# Altium PCB 剥皮器20200614.PCBDOC (part 2 of 2)
Units mm, origin at the board's own origin, x right, y up, seen from the top; angles counter-clockwise.
Board outline 94.23 x 92 mm, 4 copper layers (Top Layer, MidLayer1, MidLayer2, Bottom Layer); 71 components, 81 nets, 348 pads, 574 vias.
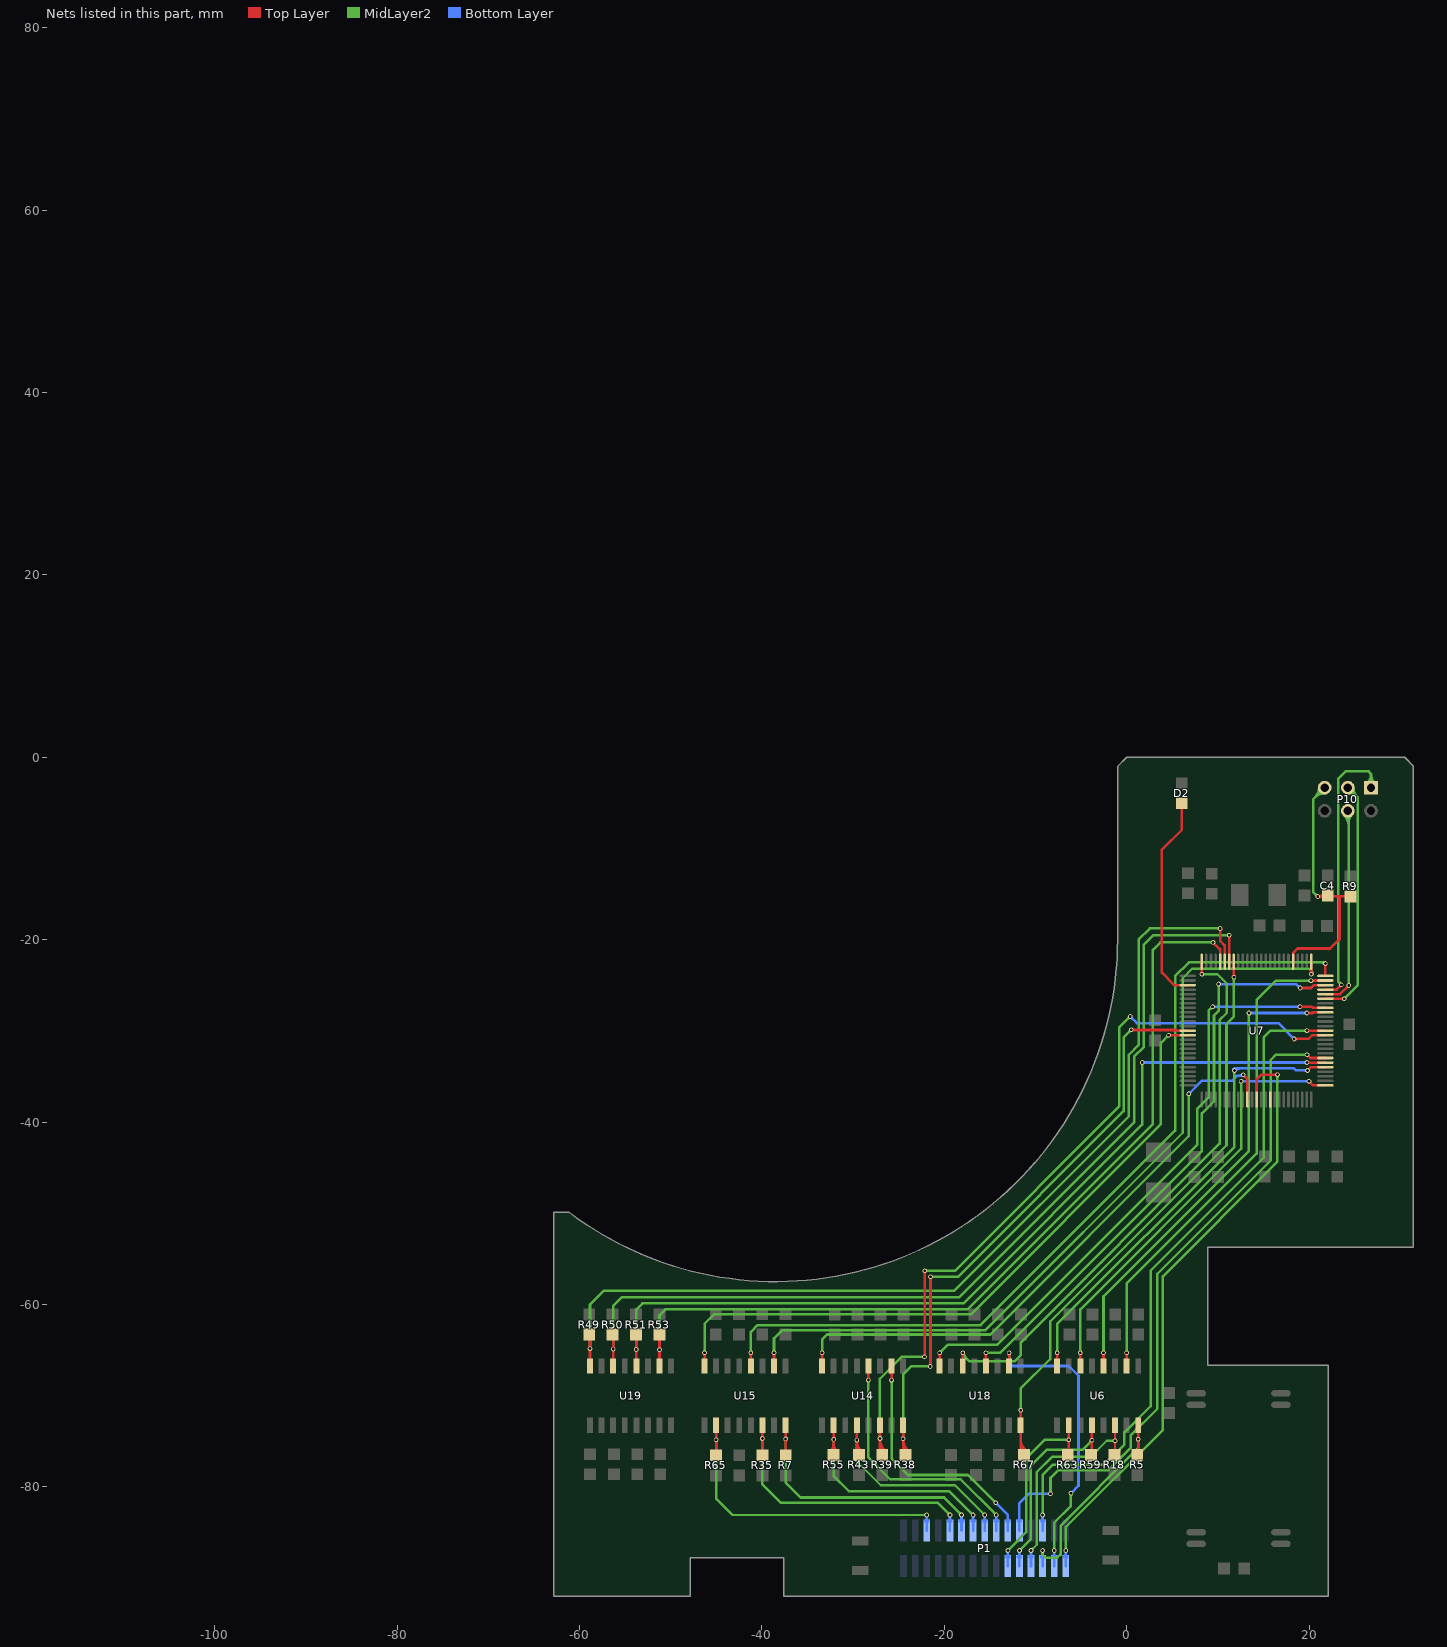
[diagram p4: the nets of this part, all layers, seen from the top]

## Via types
v1: diameter 0.508, hole 0.305, Top Layer to Bottom Layer, tented both sides, 552 vias
v2: diameter 0.762, hole 0.508, Top Layer to Bottom Layer, tented both sides, 22 vias

## Nets (pads, with @x,y where several pads share a name; then routed paths per layer and width w, separated by ;. In a path a pad name is that pad's centre, name@x,y a point inside that pad or via, vN(x,y) a via of type N, cw(c..) or ccw(c..) an arc to the next point about the centre after c; other vN are vias at no path point) (continued)
PA6_A: P1.16 R43.2 U14.12 | length 30.6
  Top Layer w0.254: R43.2@-29.735,-76.131 ccw(c-30.071,-75.795) -29.596,-75.795 ; U14.12@-29.736,-73.894 cw(c-30.074,-74.232) -29.596,-74.232 cw(c-29.118,-74.232) U14.12@-29.456,-73.894 ; v1@-29.686,-74.969 cw(c-29.903,-75.186) -29.596,-75.186 cw(c-29.29,-75.186) v1@-29.506,-74.969 ; v1@-29.686,-74.789 ccw(c-29.903,-74.573) -29.596,-74.573 ccw(c-29.29,-74.573) v1@-29.506,-74.789 ; -29.596,-75.428 ccw(c-28.458,-75.428) R43.2@-29.195,-76.296 ; U14.12@-29.596,-73.254 v1(-29.596,-74.879) ; R43.2@-29.367,-76.499 -29.596,-76.27 v1(-29.596,-74.879) ; R43.2@-29.03,-76.102 cw(c-27.993,-74.879) v1(-29.596,-74.879)
  MidLayer2 w0.254: v1@-29.686,-74.969 cw(c-29.903,-75.186) -29.596,-75.186 cw(c-29.29,-75.186) v1@-29.506,-74.969 ; v1(-29.596,-74.879) -29.596,-77.211 -26.975,-79.832 -18.833,-79.832 v1(-15.57,-83.095) ; v1@-15.697,-83.095 ccw(c-16.004,-83.095) -15.787,-82.878 ccw(c-15.57,-82.661) v1@-15.57,-82.968
  Bottom Layer w0.28: P1.16@-15.738,-83.8 ccw(c-16.13,-83.408) -15.575,-83.408 ccw(c-15.02,-83.408) P1.16@-15.412,-83.8 ; v1@-15.651,-83.176 cw(c-15.834,-83.359) -15.575,-83.359 ; P1.16@-15.575,-84.793 v1@-15.575,-83.1 ; -15.575,-83.382 cw(c-15.283,-83.382) v1@-15.49,-83.176
PB1: P10.3 U7.20 | length 30.7
  Top Layer w0.28: U7.20@21.795,-26.474 v1(23.869,-26.474) v1@23.876,-26.467 ; v1@23.788,-26.554 ccw(c23.594,-26.749) 23.594,-26.474 ccw(c23.594,-26.199) v1@23.788,-26.393
  MidLayer2 w0.28: v1(23.869,-26.474) 25.322,-25.021 25.322,-4.399 P10.3@24.252,-3.329 ; v1@23.869,-26.36 ccw(c23.869,-26.085) 24.064,-26.279 ccw(c24.258,-26.474) v1@23.983,-26.474 ; P10.3@24.252,-3.939 cw(c24.252,-5.412) 25.294,-4.371 cw(c26.335,-3.329) P10.3@24.862,-3.329 ; P10.3@24.252,-3.659 cw(c24.252,-4.456) 24.816,-3.893 cw(c25.379,-3.329) P10.3@24.582,-3.329
PB2: P10.4 U7.21 | length 26.2
  Top Layer w0.28: U7.21@21.795,-25.974 23.404,-25.974 v1(24.359,-25.019) ; v1@24.245,-25.019 cw(c23.969,-25.019) 24.164,-25.214 cw(c24.359,-25.408) v1@24.359,-25.133
  MidLayer2 w0.28: P10.4@23.821,-6.301 cw(c22.523,-7.599) 24.359,-7.599 ; P10.4@24.019,-6.103 cw(c23.199,-6.923) 24.359,-6.923 ; P10.4@24.252,-5.869 24.359,-5.976 v1(24.359,-25.019) ; v1@24.278,-24.938 ccw(c24.083,-24.744) 24.359,-24.744 ccw(c24.634,-24.744) v1@24.439,-24.938 ; 24.359,-7.085 cw(c25.468,-7.085) P10.4@24.684,-6.301
PB3: P10.1 U7.22 | length 34.7
  Top Layer w0.28: U7.22@21.795,-25.474 23.015,-25.474 v1(23.546,-24.943) ; v1@23.432,-24.943 cw(c23.157,-24.943) 23.351,-25.137 cw(c23.546,-25.332) v1@23.546,-25.057
  MidLayer2 w0.28: v1@23.432,-24.943 ccw(c23.157,-24.943) 23.351,-24.748 ccw(c23.546,-24.554) v1@23.546,-24.829 ; v1(23.546,-24.943) 23.182,-24.579 23.182,-3.505 23.182,-2.388 24.02,-1.549 26.518,-1.549 26.797,-1.829 26.797,-3.324 P10.1@26.792,-3.329 ; P10.1@26.361,-2.898 ccw(c25.308,-1.845) 26.797,-1.845 ; P10.1@26.559,-3.096 ccw(c25.984,-2.521) 26.797,-2.521 ; 26.797,-2.544 ccw(c27.577,-2.544) P10.1@27.026,-3.096 ; 26.797,-1.868 ccw(c28.253,-1.868) P10.1@27.224,-2.898
PB4: U7.23 U18.4 | length 68.8
  Top Layer w0.28: U18.4@-15.566,-66.123 ccw(c-15.882,-65.808) -15.436,-65.808 ccw(c-14.989,-65.808) U18.4@-15.305,-66.123 ; v1@-15.516,-65.391 cw(c-15.711,-65.586) -15.436,-65.586 cw(c-15.16,-65.586) v1@-15.355,-65.391 ; U18.4@-15.436,-66.754 v1(-15.436,-65.311) ; v1@19.105,-25.379 cw(c19.3,-25.574) 19.3,-25.298 cw(c19.3,-25.023) v1@19.105,-25.218 ; v1@19.126,-25.4 v1(19.025,-25.298) 20.217,-25.298 20.542,-24.974 U7.23@21.795,-24.974
  MidLayer2 w0.28: v1(-15.436,-65.311) -13.876,-65.311 8.255,-43.18 8.255,-39.04 9.576,-37.719 9.576,-28.321 10.084,-27.813 v1(10.084,-24.867) ; v1@-15.355,-65.391 cw(c-15.16,-65.586) -15.16,-65.311 cw(c-15.16,-65.035) v1@-15.355,-65.23 ; v1@10.003,-24.947 cw(c9.809,-25.142) 10.084,-25.142 cw(c10.359,-25.142) v1@10.164,-24.947
  Bottom Layer w0.28: v1(10.084,-24.867) 18.593,-24.867 v1(19.025,-25.298) ; v1@10.164,-24.947 cw(c10.359,-25.142) 10.359,-24.867 cw(c10.359,-24.591) v1@10.164,-24.786 ; v1@18.911,-25.298 ccw(c18.635,-25.298) 18.83,-25.104 ccw(c19.025,-24.909) v1@19.025,-25.184
PB5: U6.2 U7.24 | length 56.7
  Top Layer w0.28: U6.2@-0.136,-66.123 ccw(c-0.451,-65.808) -0.005,-65.808 ccw(c0.442,-65.808) U6.2@0.126,-66.123 ; v1@-0.085,-65.391 cw(c-0.28,-65.586) -0.005,-65.586 cw(c0.27,-65.586) v1@0.076,-65.391 ; v1@-0.012,-65.303 v1(-0.005,-65.311) U6.2@-0.005,-66.754 ; v1@20.218,-24.46 20.232,-24.474 U7.24@21.795,-24.474 ; v1@20.299,-24.566 cw(c20.522,-24.789) 20.522,-24.474
  MidLayer2 w0.28: v1@-0.085,-65.23 ccw(c-0.28,-65.035) -0.005,-65.035 ccw(c0.27,-65.035) v1@0.076,-65.23 ; v1(-0.005,-65.311) -0.005,-57.714 14.249,-43.459 14.249,-26.619 16.383,-24.486 v1(20.218,-24.486) ; v1@20.138,-24.566 ccw(c19.943,-24.761) 19.943,-24.486 ccw(c19.943,-24.21) v1@20.138,-24.405
PB5_A: P1.25 R5.2 U6.16 | length 27.6
  Top Layer w0.28: U6.16@1.134,-73.885 cw(c0.819,-74.201) 1.265,-74.201 cw(c1.712,-74.201) U6.16@1.396,-73.885 ; R5.2@1.164,-76.499 1.265,-76.397 v1(1.265,-74.778) U6.16@1.265,-73.254 ; v1@1.185,-74.858 cw(c0.99,-75.053) 1.265,-75.053 cw(c1.54,-75.053) v1@1.346,-74.858 ; v1@1.185,-74.697 ccw(c0.99,-74.502) 1.265,-74.502 ccw(c1.54,-74.502) v1@1.346,-74.697
  MidLayer2 w0.28: v1@-9.301,-87.076 cw(c-9.495,-87.27) -9.22,-87.27 cw(c-8.945,-87.27) v1@-9.14,-87.076 ; v1(-9.22,-86.995) -9.22,-87.452 -8.89,-87.782 -7.62,-87.782 -7.264,-87.427 -7.254,-87.427 -7.254,-84.572 -7.254,-84.288 1.265,-75.768 v1(1.265,-74.778) ; v1@1.185,-74.858 cw(c0.99,-75.053) 1.265,-75.053 cw(c1.54,-75.053) v1@1.346,-74.858
  Bottom Layer w0.28: P1.25@-9.388,-87.7 ccw(c-9.78,-87.308) -9.225,-87.308 ccw(c-8.67,-87.308) P1.25@-9.062,-87.7 ; v1@-9.301,-87.076 cw(c-9.484,-87.259) -9.225,-87.259 ; P1.25@-9.225,-88.693 v1@-9.225,-87 ; -9.225,-87.282 cw(c-8.933,-87.282) v1@-9.14,-87.076
PB6: U7.25 U15.4 | length 97.5
  Top Layer w0.28: U15.4@-41.348,-66.123 ccw(c-41.664,-65.808) -41.217,-65.808 ccw(c-40.77,-65.808) U15.4@-41.086,-66.123 ; v1@-41.298,-65.391 cw(c-41.492,-65.586) -41.217,-65.586 cw(c-40.942,-65.586) v1@-41.136,-65.391 ; v1@-41.224,-65.303 v1(-41.217,-65.311) U15.4@-41.217,-66.754 ; v1@21.714,-22.687 cw(c21.519,-22.882) 21.795,-22.882 cw(c22.07,-22.882) v1@21.875,-22.687 ; U7.25@21.795,-23.974 v1(21.795,-22.607)
  MidLayer2 w0.28: v1@-41.298,-65.23 ccw(c-41.492,-65.035) -41.217,-65.035 ccw(c-40.942,-65.035) v1@-41.136,-65.23 ; v1(-41.217,-65.311) -41.217,-63.01 -40.488,-62.281 -16.027,-62.281 5.309,-40.945 5.309,-24.003 6.833,-22.479 21.667,-22.479 v1(21.795,-22.607) ; 21.211,-22.479 cw(c21.211,-23.19) v1@21.714,-22.687
PB6_A: P1.10 R35.2 U15.14 | length 35.7
  Top Layer w0.28: U15.14@-40.078,-73.885 cw(c-40.394,-74.201) -39.947,-74.201 cw(c-39.5,-74.201) U15.14@-39.816,-73.885 ; v1@-40.028,-74.782 cw(c-40.222,-74.977) -39.947,-74.977 cw(c-39.672,-74.977) v1@-39.866,-74.782 ; v1@-40.028,-74.621 ccw(c-40.222,-74.426) -39.947,-74.426 ccw(c-39.672,-74.426) v1@-39.866,-74.621 ; U15.14@-39.947,-73.254 v1(-39.947,-74.701) -39.947,-76.545 R35.2@-39.942,-76.55
  MidLayer2 w0.28: v1@-40.028,-74.782 cw(c-40.222,-74.977) -39.947,-74.977 cw(c-39.672,-74.977) v1@-39.866,-74.782 ; v1(-39.947,-74.701) -39.947,-78.061 -39.947,-79.738 -37.948,-81.737 -20.738,-81.737 v1(-19.38,-83.095) ; v1@-19.494,-83.095 ccw(c-19.769,-83.095) -19.575,-82.9 ccw(c-19.38,-82.706) v1@-19.38,-82.981
  Bottom Layer w0.28: P1.10@-19.548,-83.8 ccw(c-19.94,-83.408) -19.385,-83.408 ccw(c-18.83,-83.408) P1.10@-19.222,-83.8 ; v1@-19.461,-83.176 cw(c-19.644,-83.359) -19.385,-83.359 ; P1.10@-19.385,-84.793 v1@-19.385,-83.1 ; -19.385,-83.382 cw(c-19.093,-83.382) v1@-19.3,-83.176
PB7: U7.26 U15.2 | length 93.4
  Top Layer w0.28: U15.2@-38.808,-66.123 ccw(c-39.124,-65.808) -38.677,-65.808 ccw(c-38.23,-65.808) U15.2@-38.546,-66.123 ; v1@-38.758,-65.391 cw(c-38.952,-65.586) -38.677,-65.586 cw(c-38.402,-65.586) v1@-38.596,-65.391 ; v1@-38.684,-65.303 v1(-38.677,-65.311) U15.2@-38.677,-66.754 ; v1@20.164,-23.71 ccw(c19.969,-23.516) 20.245,-23.516 ccw(c20.52,-23.516) v1@20.325,-23.71 ; v1(20.245,-23.791) U7.26@20.245,-22.424
  MidLayer2 w0.28: v1@-38.758,-65.23 ccw(c-38.952,-65.035) -38.677,-65.035 ccw(c-38.402,-65.035) v1@-38.596,-65.23 ; v1(-38.677,-65.311) -38.677,-63.721 -37.795,-62.84 -15.519,-62.84 6.147,-41.173 6.147,-24.232 7.188,-23.19 19.991,-23.19 20.245,-23.444 v1(20.245,-23.791) v1@20.32,-23.716 ; v1@20.164,-23.71 ccw(c19.969,-23.516) 20.245,-23.516 ccw(c20.52,-23.516) v1@20.325,-23.71 ; 20.285,-23.485 cw(c19.983,-23.787) v1@20.411,-23.794
PB7_A: P1.12 R7.2 U15.16 | length 34.3
  Top Layer w0.28: U15.16@-37.538,-73.885 cw(c-37.854,-74.201) -37.407,-74.201 cw(c-36.96,-74.201) U15.16@-37.276,-73.885 ; v1@-37.488,-74.833 cw(c-37.682,-75.027) -37.407,-75.027 cw(c-37.132,-75.027) v1@-37.326,-74.833 ; v1@-37.488,-74.672 ccw(c-37.682,-74.477) -37.407,-74.477 ccw(c-37.132,-74.477) v1@-37.326,-74.672 ; U15.16@-37.407,-73.254 v1(-37.407,-74.752) -37.407,-76.536 R7.2@-37.394,-76.55
  MidLayer2 w0.28: v1@-37.488,-74.833 cw(c-37.682,-75.027) -37.407,-75.027 cw(c-37.132,-75.027) v1@-37.326,-74.833 ; v1(-37.407,-74.752) -37.407,-77.858 -37.407,-79.535 -35.763,-81.178 -20.027,-81.178 v1(-18.11,-83.095) ; v1@-18.224,-83.095 ccw(c-18.499,-83.095) -18.305,-82.9 ccw(c-18.11,-82.706) v1@-18.11,-82.981
  Bottom Layer w0.28: P1.12@-18.278,-83.8 ccw(c-18.67,-83.408) -18.115,-83.408 ccw(c-17.56,-83.408) P1.12@-17.952,-83.8 ; v1@-18.191,-83.176 cw(c-18.374,-83.359) -18.115,-83.359 ; P1.12@-18.115,-84.793 v1@-18.115,-83.1 ; -18.115,-83.382 cw(c-17.823,-83.382) v1@-18.03,-83.176
PC0: D2.2 U7.53 | length 22.9
  Top Layer w0.28: D2.2@6.04,-5.039 6.04,-7.95 3.861,-10.13 3.861,-23.622 5.213,-24.974 U7.53@6.695,-24.974
PD0: R67.2 U7.43 U18.16 | length 70.4
  Top Layer w0.28: U18.16@-11.756,-73.885 cw(c-12.072,-74.201) -11.626,-74.201 cw(c-11.179,-74.201) U18.16@-11.495,-73.885 ; U18.16@-11.756,-72.623 ccw(c-12.072,-72.308) -11.626,-72.308 ccw(c-11.179,-72.308) U18.16@-11.495,-72.623 ; v1@-11.706,-71.683 cw(c-11.901,-71.878) -11.626,-71.878 cw(c-11.35,-71.878) v1@-11.545,-71.683 ; R67.2@-11.626,-75.887 ccw(c-10.823,-75.887) R67.2@-11.287,-76.542 ; -11.626,-75.345 ccw(c-10.439,-75.345) R67.2@-11.125,-76.313 ; v1@-11.626,-71.628 U18.16@-11.626,-73.254 -11.626,-74.803 ; R67.2@-11.257,-76.499 -11.626,-76.13 -11.626,-74.803 ; R67.2@-10.963,-76.085 cw(c-10.054,-74.803) -11.626,-74.803 ; v1@11.68,-24.049 ccw(c11.485,-23.855) 11.76,-23.855 ccw(c12.035,-23.855) v1@11.841,-24.049 ; v1@11.745,-24.114 v1(11.76,-24.13) 11.76,-22.439 U7.43@11.745,-22.424
  MidLayer2 w0.28: v1@-11.706,-71.522 ccw(c-11.901,-71.327) -11.626,-71.327 ccw(c-11.35,-71.327) v1@-11.545,-71.522 ; v1(-11.626,-71.603) -11.626,-69.24 -8.382,-65.997 -8.382,-61.874 10.947,-42.545 10.947,-29.261 11.76,-28.448 v1(11.76,-24.13) ; v1@11.68,-24.211 cw(c11.485,-24.405) 11.76,-24.405 cw(c12.035,-24.405) v1@11.841,-24.211
PD1: R50.2 U7.44 U19.14 | length 109.2
  Top Layer w0.28: U19.14@-56.447,-66.123 ccw(c-56.763,-65.808) -56.317,-65.808 ccw(c-55.87,-65.808) U19.14@-56.186,-66.123 ; v1@-56.397,-64.978 cw(c-56.592,-65.172) -56.317,-65.172 cw(c-56.041,-65.172) v1@-56.236,-64.978 ; v1@-56.397,-64.816 ccw(c-56.592,-64.622) -56.317,-64.622 ccw(c-56.041,-64.622) v1@-56.236,-64.816 ; R50.2@-56.375,-63.311 -56.317,-63.37 v1(-56.317,-64.897) U19.14@-56.317,-66.754 ; v1@11.164,-19.588 cw(c10.969,-19.782) 11.245,-19.782 cw(c11.52,-19.782) v1@11.325,-19.588 ; U7.44@11.245,-22.424 v1(11.245,-19.507)
  MidLayer2 w0.28: v1@-56.397,-64.816 ccw(c-56.592,-64.622) -56.317,-64.622 ccw(c-56.041,-64.622) v1@-56.236,-64.816 ; v1(-56.317,-64.897) -56.317,-60.177 -55.347,-59.207 -18.339,-59.207 0.826,-40.043 0.826,-32.829 1.854,-31.801 1.854,-20.574 2.921,-19.507 v1(11.245,-19.507) ; v1@11.164,-19.588 ccw(c10.969,-19.782) 10.969,-19.507 ccw(c10.969,-19.232) v1@11.164,-19.427
PD2: R49.2 U7.45 U19.16 | length 111.9
  Top Layer w0.28: U19.16@-58.987,-66.123 ccw(c-59.303,-65.808) -58.857,-65.808 ccw(c-58.41,-65.808) U19.16@-58.726,-66.123 ; R49.2@-58.944,-63.311 -58.857,-63.399 v1(-58.857,-64.846) U19.16@-58.857,-66.754 ; v1@-58.937,-64.927 cw(c-59.132,-65.121) -58.857,-65.121 cw(c-58.581,-65.121) v1@-58.776,-64.927 ; v1@-58.937,-64.766 ccw(c-59.132,-64.571) -58.857,-64.571 ccw(c-58.581,-64.571) v1@-58.776,-64.766 ; v1@10.181,-18.851 cw(c9.986,-19.046) 10.262,-19.046 cw(c10.537,-19.046) v1@10.342,-18.851 ; v1(10.262,-18.771) 10.262,-20.142 10.745,-20.625 U7.45@10.745,-22.424
  MidLayer2 w0.28: v1@-58.937,-64.766 ccw(c-59.132,-64.571) -58.857,-64.571 ccw(c-58.581,-64.571) v1@-58.776,-64.766 ; v1(-58.857,-64.846) -58.857,-60.025 -57.328,-58.496 -18.898,-58.496 0.229,-39.37 0.229,-32.639 1.321,-31.547 1.321,-19.99 2.54,-18.771 v1(10.262,-18.771) ; v1@10.181,-18.851 ccw(c9.986,-19.046) 9.986,-18.771 ccw(c9.986,-18.495) v1@10.181,-18.69
PD3: R53.2 U7.46 U19.10 | length 101.4
  Top Layer w0.28: U19.10@-51.367,-66.123 ccw(c-51.683,-65.808) -51.237,-65.808 ccw(c-50.79,-65.808) U19.10@-51.106,-66.123 ; v1@-51.317,-65.054 cw(c-51.512,-65.248) -51.237,-65.248 cw(c-50.961,-65.248) v1@-51.156,-65.054 ; v1@-51.317,-64.893 ccw(c-51.512,-64.698) -51.237,-64.698 ccw(c-50.961,-64.698) v1@-51.156,-64.893 ; U19.10@-51.237,-66.754 v1(-51.237,-64.973) R53.2@-51.237,-63.306 ; v1@9.474,-20.409 cw(c9.474,-20.684) 9.669,-20.489 cw(c9.863,-20.295) v1@9.588,-20.295 ; v1(9.474,-20.295) 10.245,-21.065 U7.46@10.245,-22.424
  MidLayer2 w0.28: v1@-51.317,-64.893 ccw(c-51.512,-64.698) -51.237,-64.698 ccw(c-50.961,-64.698) v1@-51.156,-64.893 ; v1(-51.237,-64.973) -51.237,-61.193 -50.597,-60.554 -17.475,-60.554 2.87,-40.208 2.87,-21.133 3.708,-20.295 8.712,-20.295 v1(9.474,-20.295) ; v1@9.394,-20.375 ccw(c9.199,-20.57) 9.199,-20.295 ccw(c9.199,-20.019) v1@9.394,-20.214
PD7: U7.50 U18.6 | length 65.8
  Top Layer w0.28: U18.6@-18.106,-66.123 ccw(c-18.422,-65.808) -17.976,-65.808 ccw(c-17.529,-65.808) U18.6@-17.845,-66.123 ; v1@-18.056,-65.391 cw(c-18.251,-65.586) -17.976,-65.586 cw(c-17.7,-65.586) v1@-17.895,-65.391 ; U18.6@-17.976,-66.754 v1(-17.976,-65.311) ; v1@8.164,-23.71 ccw(c7.969,-23.516) 8.245,-23.516 ccw(c8.52,-23.516) v1@8.325,-23.71 ; v1(8.245,-23.791) U7.50@8.245,-22.424
  MidLayer2 w0.28: v1(-17.976,-65.311) -17.976,-65.514 -17.247,-66.243 -12.319,-66.243 -11.608,-65.532 -11.608,-64.16 10.185,-42.367 10.185,-28.804 10.973,-28.016 10.973,-24.816 9.948,-23.791 v1(8.245,-23.791) ; v1@-17.862,-65.311 ccw(c-17.095,-65.311) -17.637,-65.853 ; v1@8.325,-23.872 cw(c8.52,-24.066) 8.52,-23.791 cw(c8.52,-23.516) v1@8.325,-23.71
PE3: U6.8 U7.5 | length 54.9
  Top Layer w0.28: U6.8@-7.756,-66.123 ccw(c-8.071,-65.808) -7.625,-65.808 ccw(c-7.178,-65.808) U6.8@-7.494,-66.123 ; v1@-7.705,-65.391 cw(c-7.9,-65.586) -7.625,-65.586 cw(c-7.35,-65.586) v1@-7.544,-65.391 ; v1@-7.632,-65.303 v1(-7.625,-65.311) U6.8@-7.625,-66.754 ; v1(19.837,-34.341) 20.204,-33.974 U7.5@21.795,-33.974 ; v1@19.837,-34.227 ccw(c19.837,-33.952) 20.032,-34.146 ccw(c20.227,-34.341) v1@19.951,-34.341
  MidLayer2 w0.28: v1@-7.705,-65.23 ccw(c-7.9,-65.035) -7.625,-65.035 ccw(c-7.35,-65.035) v1@-7.544,-65.23 ; v1(-7.625,-65.311) -7.625,-62.159 11.811,-42.723 v1(11.811,-34.341) ; v1@11.73,-34.421 cw(c11.536,-34.616) 11.811,-34.616 cw(c12.086,-34.616) v1@11.892,-34.421
  Bottom Layer w0.28: v1@11.694,-34.223 cw(c12.023,-34.553) 12.023,-34.087 ; v1(11.811,-34.341) 12.065,-34.087 18.313,-34.087 18.567,-34.341 v1(19.837,-34.341) ; v1@11.892,-34.421 cw(c12.699,-35.229) 12.699,-34.087 ; v1@19.757,-34.421 ccw(c19.562,-34.616) 19.562,-34.341 ccw(c19.562,-34.066) v1@19.757,-34.26
PE3_A: P1.19 R63.2 U6.10 | length 25.2
  Top Layer w0.28: U6.10@-6.486,-73.885 cw(c-6.801,-74.201) -6.355,-74.201 cw(c-5.908,-74.201) U6.10@-6.224,-73.885 ; R63.2@-6.456,-76.499 -6.355,-76.397 v1(-6.355,-74.854) U6.10@-6.355,-73.254 ; v1@-6.435,-74.934 cw(c-6.63,-75.129) -6.355,-75.129 cw(c-6.08,-75.129) v1@-6.274,-74.934 ; v1@-6.435,-74.773 ccw(c-6.63,-74.579) -6.355,-74.579 ccw(c-6.08,-74.579) v1@-6.274,-74.773
  MidLayer2 w0.28: v1(-13.03,-86.995) -11.024,-84.988 -11.024,-80.62 -11.024,-76.886 -8.992,-74.854 v1(-6.355,-74.854) ; v1@-13.03,-86.881 ccw(c-13.03,-86.606) -12.836,-86.8 ccw(c-12.641,-86.995) v1@-12.916,-86.995 ; v1@-6.435,-74.934 ccw(c-6.63,-75.129) -6.63,-74.854 ccw(c-6.63,-74.579) v1@-6.435,-74.773
  Bottom Layer w0.28: P1.19@-13.198,-87.7 ccw(c-13.59,-87.308) -13.035,-87.308 ccw(c-12.48,-87.308) P1.19@-12.872,-87.7 ; v1@-13.111,-87.076 cw(c-13.294,-87.259) -13.035,-87.259 ; P1.19@-13.035,-88.693 v1@-13.035,-87 ; -13.035,-87.282 cw(c-12.743,-87.282) v1@-12.95,-87.076
PE4: R51.2 U7.6 U19.12 | length 102.6
  Top Layer w0.28: U19.12@-53.907,-66.123 ccw(c-54.223,-65.808) -53.777,-65.808 ccw(c-53.33,-65.808) U19.12@-53.646,-66.123 ; v1@-53.857,-65.028 cw(c-54.052,-65.223) -53.777,-65.223 cw(c-53.501,-65.223) v1@-53.696,-65.028 ; v1@-53.857,-64.867 ccw(c-54.052,-64.673) -53.777,-64.673 ccw(c-53.501,-64.673) v1@-53.696,-64.867 ; R51.2@-53.806,-63.311 -53.777,-63.34 v1(-53.777,-64.948) U19.12@-53.777,-66.754 ; v1@19.763,-33.474 U7.6@21.795,-33.474 ; v1@19.842,-33.553 cw(c20.032,-33.743) 20.032,-33.474 ; v1@19.842,-33.391 ccw(c20.041,-33.192) 20.041,-33.474
  MidLayer2 w0.28: v1@-53.857,-64.867 ccw(c-54.052,-64.673) -53.777,-64.673 ccw(c-53.501,-64.673) v1@-53.696,-64.867 ; v1(-53.777,-64.948) -53.777,-60.558 -53.111,-59.893 -17.907,-59.893 1.702,-40.284 1.702,-34.366 ; v1@1.621,-33.553 cw(c1.427,-33.747) 1.702,-33.747 cw(c1.977,-33.747) v1@1.782,-33.553 ; 1.702,-34.087 1.702,-34.366 ; v1(1.702,-33.472) 1.702,-34.366
  Bottom Layer w0.28: v1(1.702,-33.472) v1(19.761,-33.472) ; v1@1.782,-33.553 cw(c1.977,-33.747) 1.977,-33.472 cw(c1.977,-33.197) v1@1.782,-33.391 ; v1@19.681,-33.553 ccw(c19.486,-33.747) 19.486,-33.472 ccw(c19.486,-33.197) v1@19.681,-33.391
PE5: P1.22 U7.7 | length 76.8
  Top Layer w0.28: v1@19.787,-32.728 cw(c19.787,-33.003) 19.981,-32.808 cw(c20.176,-32.614) v1@19.901,-32.614 ; v1(19.787,-32.614) 20.147,-32.974 U7.7@21.795,-32.974
  MidLayer2 w0.28: v1@-8.437,-80.691 ccw(c-8.632,-80.497) -8.357,-80.497 ccw(c-8.081,-80.497) v1@-8.276,-80.691 ; v1(-8.357,-80.772) -8.357,-79.019 -7.544,-78.207 -2.032,-78.207 0.432,-75.743 0.432,-74.371 3.353,-71.45 3.353,-56.642 15.799,-44.196 15.799,-33.172 16.358,-32.614 v1(19.787,-32.614) ; v1@19.706,-32.694 ccw(c19.511,-32.889) 19.511,-32.614 ccw(c19.511,-32.338) v1@19.706,-32.533
  Bottom Layer w0.28: P1.22@-11.928,-83.8 ccw(c-12.32,-83.408) -11.765,-83.408 ccw(c-11.21,-83.408) P1.22@-11.602,-83.8 ; P1.22@-11.765,-84.793 -11.765,-82.448 ; -11.765,-82.301 -11.765,-82.448 ; v1@-8.437,-80.853 ccw(c-8.632,-81.047) -8.632,-80.772 ccw(c-8.632,-80.497) v1@-8.437,-80.691 ; v1(-8.357,-80.772) -10.744,-80.772 -11.765,-81.793 -11.765,-82.448
PF6: U7.91
PG5: U6.6 U7.1 | length 51.3
  Top Layer w0.28: U6.6@-5.216,-66.123 ccw(c-5.531,-65.808) -5.085,-65.808 ccw(c-4.638,-65.808) U6.6@-4.954,-66.123 ; v1@-5.165,-65.391 cw(c-5.36,-65.586) -5.085,-65.586 cw(c-4.81,-65.586) v1@-5.004,-65.391 ; v1@-5.092,-65.303 v1(-5.085,-65.311) U6.6@-5.085,-66.754 ; v1@19.99,-35.649 cw(c19.99,-35.924) 20.184,-35.729 cw(c20.379,-35.535) v1@20.104,-35.535 ; v1(19.99,-35.535) 20.429,-35.974 U7.1@21.795,-35.974
  MidLayer2 w0.28: v1@-5.165,-65.23 ccw(c-5.36,-65.035) -5.085,-65.035 ccw(c-4.81,-65.035) v1@-5.004,-65.23 ; v1(-5.085,-65.311) -5.085,-60.558 12.548,-42.926 v1(12.548,-35.535) ; v1@12.467,-35.615 cw(c12.272,-35.81) 12.548,-35.81 cw(c12.823,-35.81) v1@12.628,-35.615
  Bottom Layer w0.28: v1(12.548,-35.535) v1(19.99,-35.535) ; v1@12.628,-35.615 cw(c12.823,-35.81) 12.823,-35.535 cw(c12.823,-35.259) v1@12.628,-35.454 ; v1@19.909,-35.615 ccw(c19.715,-35.81) 19.715,-35.535 ccw(c19.715,-35.259) v1@19.909,-35.454
PG5_A: P1.21 R59.2 U6.12 | length 26.4
  Top Layer w0.28: U6.12@-3.946,-73.885 cw(c-4.261,-74.201) -3.815,-74.201 cw(c-3.368,-74.201) U6.12@-3.684,-73.885 ; R59.2@-3.916,-76.499 -3.815,-76.397 v1(-3.815,-74.905) U6.12@-3.815,-73.254 ; v1@-3.895,-74.985 cw(c-4.09,-75.18) -3.815,-75.18 cw(c-3.54,-75.18) v1@-3.734,-74.985 ; v1@-3.895,-74.824 ccw(c-4.09,-74.629) -3.815,-74.629 ccw(c-3.54,-74.629) v1@-3.734,-74.824
  MidLayer2 w0.28: v1(-11.76,-86.995) -10.516,-85.75 -10.516,-77.673 -8.788,-75.946 -4.856,-75.946 v1(-3.815,-74.905) ; v1@-11.76,-86.881 ccw(c-11.76,-86.606) -11.566,-86.8 ccw(c-11.371,-86.995) v1@-11.646,-86.995 ; v1@-3.929,-74.905 cw(c-4.204,-74.905) -4.009,-75.099 cw(c-3.815,-75.294) v1@-3.815,-75.019
  Bottom Layer w0.28: P1.21@-11.928,-87.7 ccw(c-12.32,-87.308) -11.765,-87.308 ccw(c-11.21,-87.308) P1.21@-11.602,-87.7 ; v1@-11.841,-87.076 cw(c-12.024,-87.259) -11.765,-87.259 ; P1.21@-11.765,-88.693 v1@-11.765,-87 ; -11.765,-87.282 cw(c-11.473,-87.282) v1@-11.68,-87.076
PH0_RXD2: R39.2 U7.12 U14.14 | length 95.2
  Top Layer w0.28: U14.14@-27.187,-73.885 cw(c-27.503,-74.201) -27.056,-74.201 cw(c-26.61,-74.201) U14.14@-26.925,-73.885 ; R39.2@-27.161,-76.14 ccw(c-27.413,-75.887) R39.2@-27.056,-75.887 ; v1@-27.137,-74.782 cw(c-27.331,-74.977) -27.056,-74.977 cw(c-26.781,-74.977) v1@-26.976,-74.782 ; v1@-27.137,-74.621 ccw(c-27.331,-74.426) -27.056,-74.426 ccw(c-26.781,-74.426) v1@-26.976,-74.621 ; -27.056,-75.362 ccw(c-25.702,-75.362) R39.2@-26.644,-76.335 ; U14.14@-27.056,-73.254 v1(-27.056,-74.701) ; R39.2@-26.802,-76.499 -27.056,-76.244 v1(-27.056,-74.701) ; R39.2@-26.449,-76.134 cw(c-25.063,-74.701) v1(-27.056,-74.701) ; v1@-22.255,-65.655 ccw(c-22.511,-65.399) -22.149,-65.399 ; v1@-22.229,-56.392 cw(c-22.424,-56.587) -22.149,-56.587 cw(c-21.874,-56.587) v1@-22.068,-56.392 ; v1@-22.149,-65.735 v1(-22.149,-56.312) ; v1(18.364,-30.886) 19.939,-30.886 20.352,-30.474 U7.12@21.795,-30.474 ; v1@18.445,-30.967 cw(c18.639,-31.162) 18.639,-30.886 cw(c18.639,-30.611) v1@18.445,-30.806
  MidLayer2 w0.28: v1@-27.137,-74.621 ccw(c-27.331,-74.426) -27.056,-74.426 ccw(c-26.781,-74.426) v1@-26.976,-74.621 ; v1(-27.056,-74.701) -27.056,-68.153 -24.638,-65.735 v1(-22.174,-65.735) ; v1@-22.255,-65.816 ccw(c-22.449,-66.01) -22.449,-65.735 ccw(c-22.449,-65.46) v1@-22.255,-65.655 ; v1(-22.149,-56.312) -18.847,-56.312 -0.796,-38.261 -0.796,-29.6 v1(0.381,-28.423) ; v1@-22.068,-56.392 cw(c-21.874,-56.587) -21.874,-56.312 cw(c-21.874,-56.037) v1@-22.068,-56.231 ; v1@0.267,-28.423 cw(c-0.008,-28.423) 0.186,-28.617 cw(c0.381,-28.812) v1@0.381,-28.537
  Bottom Layer w0.28: v1@0.381,-28.537 cw(c0.381,-28.812) 0.576,-28.617 cw(c0.77,-28.423) v1@0.495,-28.423 ; v1(0.381,-28.423) 1.118,-29.159 16.637,-29.159 v1(18.364,-30.886) ; v1@18.25,-30.886 ccw(c17.975,-30.886) 18.17,-30.692 ccw(c18.364,-30.497) v1@18.364,-30.772
PH0_RXD2_A: P1.18 U14.4 | length 31.7
  Top Layer w0.28: U14.4@-28.457,-67.385 cw(c-28.773,-67.701) -28.326,-67.701 cw(c-27.88,-67.701) U14.4@-28.195,-67.385 ; v1@-28.407,-68.222 ccw(c-28.601,-68.028) -28.326,-68.028 ccw(c-28.051,-68.028) v1@-28.246,-68.222 ; v1(-28.326,-68.303) U14.4@-28.326,-66.754
  MidLayer2 w0.28: v1@-28.407,-68.384 cw(c-28.601,-68.578) -28.326,-68.578 cw(c-28.051,-68.578) v1@-28.246,-68.384 ; v1(-28.326,-68.303) -28.326,-76.779 -25.933,-79.172 -18.223,-79.172 v1(-14.3,-83.095) ; v1@-14.414,-83.095 ccw(c-14.689,-83.095) -14.495,-82.9 ccw(c-14.3,-82.706) v1@-14.3,-82.981
  Bottom Layer w0.28: P1.18@-14.468,-83.8 ccw(c-14.86,-83.408) -14.305,-83.408 ccw(c-13.75,-83.408) P1.18@-14.142,-83.8 ; v1@-14.381,-83.176 cw(c-14.564,-83.359) -14.305,-83.359 ; P1.18@-14.305,-84.793 v1@-14.305,-83.1 ; -14.305,-83.382 cw(c-14.013,-83.382) v1@-14.22,-83.176
PH1_TXD2: P1.26 U7.13 | length 77.1
  Top Layer w0.28: v1(19.761,-29.972) 19.763,-29.974 U7.13@21.795,-29.974 ; v1@19.842,-30.053 cw(c20.032,-30.243) 20.032,-29.974 ; v1@19.842,-29.891 ccw(c20.041,-29.692) 20.041,-29.974
  MidLayer2 w0.28: v1@-9.301,-83.014 ccw(c-9.495,-82.82) -9.22,-82.82 ccw(c-8.945,-82.82) v1@-9.14,-83.014 ; v1(-9.22,-83.095) -9.22,-78.715 -8.077,-77.572 -2.464,-77.572 -0.254,-75.362 -0.254,-74.041 2.642,-71.145 2.642,-56.286 15.011,-43.917 15.011,-30.734 15.773,-29.972 v1(19.761,-29.972) ; v1@19.681,-30.053 ccw(c19.486,-30.247) 19.486,-29.972 ccw(c19.486,-29.697) v1@19.681,-29.891
  Bottom Layer w0.28: P1.26@-9.388,-83.8 ccw(c-9.78,-83.408) -9.225,-83.408 ccw(c-8.67,-83.408) P1.26@-9.062,-83.8 ; v1@-9.301,-83.176 cw(c-9.484,-83.359) -9.225,-83.359 ; P1.26@-9.225,-84.793 v1@-9.225,-83.1 ; -9.225,-83.382 cw(c-8.933,-83.382) v1@-9.14,-83.176
PH5: U6.4 U7.17 | length 57
  Top Layer w0.28: U6.4@-2.676,-66.123 ccw(c-2.991,-65.808) -2.545,-65.808 ccw(c-2.098,-65.808) U6.4@-2.414,-66.123 ; v1@-2.625,-65.391 cw(c-2.82,-65.586) -2.545,-65.586 cw(c-2.27,-65.586) v1@-2.464,-65.391 ; v1@-2.552,-65.303 v1(-2.545,-65.311) U6.4@-2.545,-66.754 ; v1(19.761,-28.042) 20.387,-28.042 20.455,-27.974 U7.17@21.795,-27.974 ; v1@19.842,-28.122 cw(c20.036,-28.317) 20.036,-28.042 cw(c20.036,-27.766) v1@19.842,-27.961
  MidLayer2 w0.28: v1@-2.625,-65.23 ccw(c-2.82,-65.035) -2.545,-65.035 ccw(c-2.27,-65.035) v1@-2.464,-65.23 ; v1(-2.545,-65.311) -2.545,-59.111 13.411,-43.155 v1(13.411,-28.042) ; v1@13.331,-28.122 cw(c13.136,-28.317) 13.411,-28.317 cw(c13.686,-28.317) v1@13.492,-28.122
  Bottom Layer w0.28: v1(13.411,-28.042) v1(19.761,-28.042) ; v1@13.492,-28.122 cw(c13.686,-28.317) 13.686,-28.042 cw(c13.686,-27.766) v1@13.492,-27.961 ; v1@19.681,-28.122 ccw(c19.486,-28.317) 19.486,-28.042 ccw(c19.486,-27.766) v1@19.681,-27.961
PH5_A: P1.23 R18.2 U6.14 | length 27.8
  Top Layer w0.254: U6.14@-1.415,-73.894 cw(c-1.753,-74.232) -1.275,-74.232 cw(c-0.797,-74.232) U6.14@-1.135,-73.894 ; v1@-1.365,-75.045 cw(c-1.581,-75.262) -1.275,-75.262 cw(c-0.968,-75.262) v1@-1.185,-75.045 ; v1@-1.365,-74.866 ccw(c-1.581,-74.649) -1.275,-74.649 ccw(c-0.968,-74.649) v1@-1.185,-74.866 ; R18.2@-1.351,-76.499 -1.275,-76.423 v1(-1.275,-74.955) U6.14@-1.275,-73.254
  MidLayer2 w0.254: v1(-10.49,-86.995) -9.855,-86.36 -9.855,-78.384 -8.191,-76.721 -3.95,-76.721 -2.184,-74.955 v1(-1.275,-74.955) ; v1@-10.49,-86.868 ccw(c-10.49,-86.561) -10.273,-86.778 ccw(c-10.057,-86.995) v1@-10.363,-86.995 ; v1@-1.365,-75.045 ccw(c-1.581,-75.262) -1.581,-74.955 ccw(c-1.581,-74.649) v1@-1.365,-74.866
  Bottom Layer w0.28: P1.23@-10.658,-87.7 ccw(c-11.05,-87.308) -10.495,-87.308 ccw(c-9.94,-87.308) P1.23@-10.332,-87.7 ; v1@-10.571,-87.076 cw(c-10.754,-87.259) -10.495,-87.259 ; P1.23@-10.495,-88.693 v1@-10.495,-87 ; -10.495,-87.282 cw(c-10.203,-87.282) v1@-10.41,-87.076
PH6: U7.18 U18.8 | length 70.7
  Top Layer w0.28: U18.8@-20.646,-66.123 ccw(c-20.962,-65.808) -20.516,-65.808 ccw(c-20.069,-65.808) U18.8@-20.385,-66.123 ; v1@-20.596,-65.391 cw(c-20.791,-65.586) -20.516,-65.586 cw(c-20.24,-65.586) v1@-20.435,-65.391 ; v1@-20.523,-65.303 v1(-20.516,-65.311) U18.8@-20.516,-66.754 ; v1(18.999,-27.356) 20.32,-27.356 20.438,-27.474 U7.18@21.795,-27.474 ; v1@19.08,-27.436 cw(c19.274,-27.631) 19.274,-27.356 cw(c19.274,-27.081) v1@19.08,-27.275
  MidLayer2 w0.28: v1(-20.516,-65.311) -19.645,-64.44 -14.199,-64.44 7.727,-42.514 7.727,-38.577 8.992,-37.313 8.992,-27.788 v1(9.423,-27.356) ; v1@-20.516,-65.197 ccw(c-20.516,-64.921) -20.321,-65.116 ccw(c-20.126,-65.311) v1@-20.402,-65.311 ; v1@9.309,-27.356 cw(c9.034,-27.356) 9.229,-27.55 cw(c9.423,-27.745) v1@9.423,-27.47
  Bottom Layer w0.28: v1(9.423,-27.356) v1(18.999,-27.356) ; v1@9.504,-27.436 cw(c9.699,-27.631) 9.699,-27.356 cw(c9.699,-27.081) v1@9.504,-27.275 ; v1@18.919,-27.436 ccw(c18.724,-27.631) 18.724,-27.356 ccw(c18.724,-27.081) v1@18.919,-27.275
PJ0_RX3: R38.2 U7.63 U14.16 | length 75
  Top Layer w0.28: U14.16@-24.647,-73.885 cw(c-24.963,-74.201) -24.516,-74.201 cw(c-24.07,-74.201) U14.16@-24.385,-73.885 ; R38.2@-24.621,-76.14 ccw(c-24.873,-75.887) R38.2@-24.516,-75.887 ; v1@-24.597,-74.807 cw(c-24.791,-75.002) -24.516,-75.002 cw(c-24.241,-75.002) v1@-24.436,-74.807 ; v1@-24.597,-74.646 ccw(c-24.791,-74.452) -24.516,-74.452 ccw(c-24.241,-74.452) v1@-24.436,-74.646 ; -24.516,-75.378 ccw(c-23.2,-75.378) R38.2@-24.105,-76.334 ; U14.16@-24.516,-73.254 v1(-24.516,-74.727) ; R38.2@-24.262,-76.499 -24.516,-76.244 v1(-24.516,-74.727) ; R38.2@-23.913,-76.13 cw(c-22.583,-74.727) v1(-24.516,-74.727) ; v1@-21.62,-66.721 ccw(c-21.876,-66.465) -21.514,-66.465 ; v1@-21.594,-57.053 cw(c-21.789,-57.247) -21.514,-57.247 cw(c-21.239,-57.247) v1@-21.433,-57.053 ; v1@-21.514,-66.802 v1(-21.514,-56.972) ; v1(0.508,-29.87) 0.544,-29.906 5.368,-29.906 5.436,-29.974 U7.63@6.695,-29.974 ; v1@0.589,-29.79 ccw(c0.869,-29.509) 0.869,-29.906
  MidLayer2 w0.28: v1@-24.597,-74.646 ccw(c-24.791,-74.452) -24.516,-74.452 ccw(c-24.241,-74.452) v1@-24.436,-74.646 ; v1(-24.516,-74.727) -24.516,-67.671 -23.647,-66.802 v1(-21.539,-66.802) ; v1@-21.62,-66.883 ccw(c-21.814,-67.077) -21.814,-66.802 ccw(c-21.814,-66.527) v1@-21.62,-66.721 ; v1(-21.514,-56.972) -18.517,-56.972 -0.33,-38.786 -0.33,-30.709 v1(0.508,-29.87) ; v1@-21.433,-57.053 cw(c-21.239,-57.247) -21.239,-56.972 cw(c-21.239,-56.697) v1@-21.433,-56.892 ; v1@0.394,-29.87 cw(c0.119,-29.87) 0.313,-30.065 cw(c0.508,-30.26) v1@0.508,-29.984
PJ0_RX3_A: P1.20 U14.2 | length 30.5
  Top Layer w0.28: U14.2@-25.917,-67.385 cw(c-26.233,-67.701) -25.786,-67.701 cw(c-25.34,-67.701) U14.2@-25.655,-67.385 ; v1@-25.867,-68.222 ccw(c-26.061,-68.028) -25.786,-68.028 ccw(c-25.511,-68.028) v1@-25.706,-68.222 ; v1(-25.786,-68.303) U14.2@-25.786,-66.754
  MidLayer2 w0.28: v1@-25.867,-68.384 cw(c-26.061,-68.578) -25.786,-68.578 cw(c-25.511,-68.578) v1@-25.706,-68.384 ; v1(-25.786,-68.303) -25.786,-76.881 -23.96,-78.707 -17.407,-78.707 v1(-14.351,-81.763) ; v1@-14.465,-81.763 ccw(c-14.74,-81.763) -14.546,-81.568 ccw(c-14.351,-81.373) v1@-14.351,-81.649
  Bottom Layer w0.28: v1@-14.351,-81.877 cw(c-14.351,-82.152) -14.156,-81.957 cw(c-13.962,-81.763) v1@-14.237,-81.763 ; v1(-14.351,-81.763) -13.035,-83.079 P1.20@-13.035,-84.793 ; P1.20@-13.198,-83.8 ccw(c-13.59,-83.408) -13.035,-83.408 ccw(c-12.48,-83.408) P1.20@-12.872,-83.8
PJ1_A: P1.6 R65.2 U15.10 | length 39.3
  Top Layer w0.254: U15.10@-45.167,-73.894 cw(c-45.505,-74.232) -45.027,-74.232 cw(c-44.549,-74.232) U15.10@-44.887,-73.894 ; v1@-45.117,-74.944 cw(c-45.334,-75.16) -45.027,-75.16 cw(c-44.72,-75.16) v1@-44.937,-74.944 ; v1@-45.117,-74.764 ccw(c-45.334,-74.547) -45.027,-74.547 ccw(c-44.72,-74.547) v1@-44.937,-74.764 ; R65.2@-45.039,-76.55 -45.027,-76.538 v1(-45.027,-74.854) U15.10@-45.027,-73.254
  MidLayer2 w0.254: v1@-45.117,-74.944 cw(c-45.334,-75.16) -45.027,-75.16 cw(c-44.72,-75.16) v1@-44.937,-74.944 ; v1(-45.027,-74.854) -45.027,-81.287 -43.219,-83.095 v1(-21.92,-83.095) ; v1@-22.01,-83.185 ccw(c-22.227,-83.402) -22.227,-83.095 ccw(c-22.227,-82.788) v1@-22.01,-83.005
  Bottom Layer w0.28: P1.6@-22.088,-83.8 ccw(c-22.48,-83.408) -21.925,-83.408 ccw(c-21.37,-83.408) P1.6@-21.762,-83.8 ; v1@-22.001,-83.176 cw(c-22.184,-83.359) -21.925,-83.359 ; P1.6@-21.925,-84.793 v1@-21.925,-83.1 ; -21.925,-83.382 cw(c-21.633,-83.382) v1@-21.84,-83.176
PJ1_TX3: U7.64 U15.8 | length 78.4
  Top Layer w0.28: U15.8@-46.428,-66.123 ccw(c-46.744,-65.808) -46.297,-65.808 ccw(c-45.85,-65.808) U15.8@-46.166,-66.123 ; v1@-46.378,-65.391 cw(c-46.572,-65.586) -46.297,-65.586 cw(c-46.022,-65.586) v1@-46.216,-65.391 ; v1@-46.304,-65.303 v1(-46.297,-65.311) U15.8@-46.297,-66.754 ; v1(4.597,-30.48) 4.604,-30.474 U7.64@6.695,-30.474 ; v1@4.678,-30.561 cw(c4.887,-30.77) 4.887,-30.474 ; v1@4.678,-30.399 ccw(c4.858,-30.22) 4.858,-30.474
  MidLayer2 w0.28: v1@-46.378,-65.23 ccw(c-46.572,-65.035) -46.297,-65.035 ccw(c-46.022,-65.035) v1@-46.216,-65.23 ; v1(-46.297,-65.311) -46.297,-62.121 -45.263,-61.087 -17.094,-61.087 3.759,-40.234 3.759,-31.318 v1(4.597,-30.48) ; v1@4.483,-30.48 cw(c4.208,-30.48) 4.403,-30.675 cw(c4.597,-30.869) v1@4.597,-30.594 ; v1@4.61,-30.493 v1@4.623,-30.48
PK1: P1.29 U7.88 | length 71.1
  Top Layer w0.28: U7.88@14.245,-37.524 14.245,-35.336 14.783,-34.798 15.621,-34.798 ; 15.951,-34.798 15.621,-34.798 ; v1@16.455,-34.879 ccw(c16.26,-35.073) 16.26,-34.798 ccw(c16.26,-34.523) v1@16.455,-34.717 ; v1(16.535,-34.798) 15.621,-34.798
  MidLayer2 w0.28: v1@-6.761,-86.914 ccw(c-6.955,-86.72) -6.68,-86.72 ccw(c-6.405,-86.72) v1@-6.6,-86.914 ; v1(-6.68,-86.995) -6.68,-84.404 3.962,-73.762 3.962,-56.921 16.535,-44.348 v1(16.535,-34.798) ; v1@16.455,-34.879 cw(c16.26,-35.073) 16.535,-35.073 cw(c16.811,-35.073) v1@16.616,-34.879
  Bottom Layer w0.28: P1.29@-6.848,-87.7 ccw(c-7.24,-87.308) -6.685,-87.308 ccw(c-6.13,-87.308) P1.29@-6.522,-87.7 ; v1@-6.761,-87.076 cw(c-6.944,-87.259) -6.685,-87.259 ; P1.29@-6.685,-88.693 v1@-6.685,-87 ; -6.685,-87.282 cw(c-6.393,-87.282) v1@-6.6,-87.076
PK3: U7.86 U14.8 | length 70.3
  Top Layer w0.28: U14.8@-33.537,-66.123 ccw(c-33.853,-65.808) -33.406,-65.808 ccw(c-32.96,-65.808) U14.8@-33.275,-66.123 ; v1@-33.487,-65.391 cw(c-33.681,-65.586) -33.406,-65.586 cw(c-33.131,-65.586) v1@-33.326,-65.391 ; v1@-33.414,-65.303 v1(-33.406,-65.311) U14.8@-33.406,-66.754 ; v1@12.776,-34.937 cw(c12.776,-35.213) 12.971,-35.018 cw(c13.165,-34.823) v1@12.89,-34.823 ; v1(12.776,-34.823) 13.245,-35.292 U7.86@13.245,-37.524
  MidLayer2 w0.28: v1@-33.487,-65.23 ccw(c-33.681,-65.035) -33.406,-65.035 ccw(c-33.131,-65.035) v1@-33.326,-65.23 ; v1(-33.406,-65.311) -33.406,-63.864 -32.842,-63.3 -14.938,-63.3 6.807,-41.554 6.807,-37.821 ; v1@6.727,-36.987 cw(c6.532,-37.181) 6.807,-37.181 cw(c7.082,-37.181) v1@6.888,-36.987 ; 6.807,-37.567 6.807,-37.821 ; v1(6.807,-36.906) 6.807,-37.821
  Bottom Layer w0.28: v1(6.807,-36.906) 8.23,-35.484 11.547,-35.484 11.989,-35.042 12.116,-34.915 12.685,-34.915 v1(12.776,-34.823) ; v1@6.807,-36.792 ccw(c6.807,-36.517) 7.002,-36.712 ccw(c7.196,-36.906) v1@6.921,-36.906 ; 12.28,-34.915 ccw(c12.28,-34.328) v1@12.696,-34.743
PK3_A: P1.14 R55.2 U14.10 | length 31.7
  Top Layer w0.28: R55.2@-32.495,-76.14 ccw(c-33.361,-75.274) -32.136,-75.274 ; U14.10@-32.267,-73.885 cw(c-32.583,-74.201) -32.136,-74.201 cw(c-31.69,-74.201) U14.10@-32.005,-73.885 ; v1@-32.217,-74.884 cw(c-32.411,-75.078) -32.136,-75.078 cw(c-31.861,-75.078) v1@-32.056,-74.884 ; v1@-32.217,-74.722 ccw(c-32.411,-74.528) -32.136,-74.528 ccw(c-31.861,-74.528) v1@-32.056,-74.722 ; R55.2@-32.136,-76.498 v1(-32.136,-74.803) U14.10@-32.136,-73.254 ; -32.136,-75.272 ccw(c-30.909,-75.272) R55.2@-31.777,-76.14
  MidLayer2 w0.28: v1@-32.217,-74.884 cw(c-32.411,-75.078) -32.136,-75.078 cw(c-31.861,-75.078) v1@-32.056,-74.884 ; v1(-32.136,-74.803) -32.136,-76.804 -32.136,-78.811 -30.48,-80.467 -19.468,-80.467 v1(-16.84,-83.095) ; v1@-16.954,-83.095 ccw(c-17.229,-83.095) -17.035,-82.9 ccw(c-16.84,-82.706) v1@-16.84,-82.981
  Bottom Layer w0.28: P1.14@-17.008,-83.8 ccw(c-17.4,-83.408) -16.845,-83.408 ccw(c-16.29,-83.408) P1.14@-16.682,-83.8 ; v1@-16.921,-83.176 cw(c-17.104,-83.359) -16.845,-83.359 ; P1.14@-16.845,-84.793 v1@-16.845,-83.1 ; -16.845,-83.382 cw(c-16.553,-83.382) v1@-16.76,-83.176
RESET: C4.1 P10.5 R9.1 U7.30 | length 33.9
  Top Layer w0.28: U7.30@18.245,-22.424 18.245,-21.481 18.758,-20.968 22.314,-20.968 23.338,-19.944 23.338,-15.25 ; U7.30@18.245,-21.664 cw(c18.686,-21.664) 18.374,-21.352 ; v1@21.036,-15.346 cw(c21.23,-15.541) 21.23,-15.265 cw(c21.23,-14.99) v1@21.036,-15.185 ; v1@21.048,-15.265 cw(c21.048,-16.171) C4.1@21.688,-15.531 ; C4.1@21.618,-14.9 cw(c20.955,-14.481) v1(20.955,-15.265) 22.098,-15.265 22.114,-15.25 23.338,-15.25 ; 23.343,-15.254 23.338,-15.25 ; R9.1@24.536,-15.25 23.338,-15.25
  MidLayer2 w0.28: v1@20.841,-15.265 ccw(c20.566,-15.265) 20.76,-15.071 ccw(c20.955,-14.876) v1@20.955,-15.151 ; v1(20.955,-15.265) 20.442,-14.753 20.442,-4.599 P10.5@21.712,-3.329 ; P10.5@21.102,-3.329 cw(c19.63,-3.329) 20.671,-4.371 cw(c21.712,-5.412) P10.5@21.712,-3.939 ; P10.5@21.382,-3.329 cw(c20.585,-3.329) 21.149,-3.893 cw(c21.712,-4.456) P10.5@21.712,-3.659
霍尔: P1.27 U18.2 | length 36.9
  Top Layer w0.28: U18.2@-13.026,-66.123 ccw(c-13.342,-65.808) -12.896,-65.808 ccw(c-12.449,-65.808) U18.2@-12.765,-66.123 ; v1@-12.976,-65.391 cw(c-13.171,-65.586) -12.896,-65.586 cw(c-12.62,-65.586) v1@-12.815,-65.391 ; v1@-12.903,-65.303 v1(-12.896,-65.311) U18.2@-12.896,-66.754
  MidLayer2 w0.28: v1@-8.031,-86.914 ccw(c-8.225,-86.72) -7.95,-86.72 ccw(c-7.675,-86.72) v1@-7.87,-86.914 ; v1(-7.95,-86.995) -7.95,-83.947 -6.121,-82.118 v1(-6.121,-80.721) ; v1@-6.202,-80.802 cw(c-6.397,-80.996) -6.121,-80.996 cw(c-5.846,-80.996) v1@-6.041,-80.802
  Bottom Layer w0.28: v1@-12.976,-65.391 cw(c-13.171,-65.586) -12.896,-65.586 cw(c-12.62,-65.586) v1@-12.815,-65.391 ; v1(-12.896,-65.311) -12.896,-66.403 -12.545,-66.754 -6.355,-66.754 -5.283,-67.826 -5.283,-79.883 v1(-6.121,-80.721) ; P1.27@-8.118,-87.7 ccw(c-8.51,-87.308) -7.955,-87.308 ccw(c-7.4,-87.308) P1.27@-7.792,-87.7 ; v1@-8.031,-87.076 cw(c-8.214,-87.259) -7.955,-87.259 ; P1.27@-7.955,-88.693 v1@-7.955,-87 ; -7.955,-87.282 cw(c-7.663,-87.282) v1@-7.87,-87.076 ; v1@-6.121,-80.607 ccw(c-6.121,-80.332) -5.927,-80.527 ccw(c-5.732,-80.721) v1@-6.007,-80.721
pads on no net: U7.2 U7.3 U7.4 U7.8 U7.9 U7.14 U7.15 U7.16 U7.19 U7.27 U7.28 U7.29 U7.35 U7.36 U7.37 U7.38 U7.39 U7.40 U7.41 U7.42 U7.47 U7.48 U7.49 U7.51 U7.52 U7.54 U7.55 U7.56 U7.57 U7.58 U7.59 U7.60 U7.65 U7.66 U7.67 U7.68 U7.69 U7.70 U7.71 U7.73 U7.74 U7.75 U7.77 U7.78 U7.79 U7.82 U7.83 U7.84 U7.85 U7.87 U7.90 U7.92 U7.93 U7.94 U7.95 U7.96 U7.97
copper on no net:
  other v1: -1.372,-70.358

## Polygon pours and split planes (outlines as drawn)
AGND on Top Layer "Top Layer-No Net" (solid, remove dead copper, pour order 1001): -65.126,-93.243 -22.885,-93.243 -22.885,-90.373 -22.885,-83.718 -25.984,-83.718 -48.717,-83.718 -48.717,-81.839 -48.717,-68.58 -45.644,-68.58 -33.909,-68.58 -33.909,-73.228 -33.909,-74.473 -23.927,-74.473 -23.952,-74.473 -23.952,-72.517 -23.952,-68.58 -16.713,-68.58 -13.487,-68.58 -13.487,-72.263 -13.487,-74.803 -11.024,-74.803 -11.024,-72.517 -11.024,-68.682 -5.029,-68.682 3.683,-68.682 3.683,-71.679 3.683,-75.794 13.894,-75.794 35.687,-75.794 35.687,-64.821 35.687,11.506 32.868,11.506 -74.168,11.506 -74.168,-2.819 -74.168,-93.294 -64.872,-93.294
GND on Top Layer "Top Layer-No Net" (solid, remove dead copper, pour order 1000): -47.066,-70.485 -35.712,-70.485 -35.712,-72.74 -35.712,-76.659 -23.089,-76.659 -22.758,-76.659 -22.758,-71.866 -22.758,-70.485 -14.707,-70.485 -14.707,-75.903 -9.804,-75.903 -9.804,-71.021 2.159,-71.021 2.159,-78.181 2.159,-78.237 23.749,-78.237 24.028,-78.237 24.028,-91.515 24.028,-95.885 22.53,-95.885 -21.006,-95.885 -21.006,-82.089 -21.006,-82.071 -47.066,-82.071 -47.066,-70.485
AGND on MidLayer1 "Top Layer-No Net" (solid, remove dead copper, pour order 1003): -65.141,-93.228 -22.901,-93.228 -22.901,-90.357 -22.901,-83.703 -26,-83.703 -48.733,-83.703 -48.733,-81.823 -48.733,-68.564 -45.66,-68.564 -33.925,-68.564 -33.925,-73.212 -33.925,-74.457 -23.943,-74.457 -23.968,-74.457 -23.968,-72.501 -23.968,-68.564 -16.729,-68.564 -13.503,-68.564 -13.503,-72.247 -13.503,-74.787 -11.039,-74.787 -11.039,-72.501 -11.039,-68.666 -5.045,-68.666 3.667,-68.666 3.667,-71.663 3.667,-75.778 13.878,-75.778 35.671,-75.778 35.671,-64.805 35.671,11.522 32.852,11.522 -74.184,11.522 -74.184,-2.804 -74.184,-93.278 -64.887,-93.278
GND on MidLayer1 "Top Layer-No Net" (solid, remove dead copper, pour order 1002): -47.066,-70.485 -35.712,-70.485 -35.712,-72.74 -35.712,-76.659 -23.089,-76.659 -22.758,-76.659 -22.758,-71.866 -22.758,-70.485 -14.707,-70.485 -14.707,-75.903 -9.804,-75.903 -9.804,-71.021 2.159,-71.021 2.159,-78.181 2.159,-78.237 23.749,-78.237 24.028,-78.237 24.028,-91.515 24.028,-95.885 22.53,-95.885 -21.006,-95.885 -21.006,-82.089 -21.006,-82.071 -47.066,-82.071 -47.066,-70.485
AGND on MidLayer2 "Top Layer-No Net" (solid, remove dead copper, pour order 1005): -65.141,-93.228 -22.901,-93.228 -22.901,-90.357 -22.901,-83.703 -26,-83.703 -48.733,-83.703 -48.733,-81.823 -48.733,-68.564 -45.66,-68.564 -33.925,-68.564 -33.925,-73.212 -33.925,-74.457 -23.943,-74.457 -23.968,-74.457 -23.968,-72.501 -23.968,-68.564 -16.729,-68.564 -13.503,-68.564 -13.503,-72.247 -13.503,-74.787 -11.039,-74.787 -11.039,-72.501 -11.039,-68.666 -5.045,-68.666 3.667,-68.666 3.667,-71.663 3.667,-75.778 13.878,-75.778 35.671,-75.778 35.671,-64.805 35.671,11.522 32.852,11.522 -74.184,11.522 -74.184,-2.804 -74.184,-93.278 -64.887,-93.278
GND on MidLayer2 "Top Layer-No Net" (solid, remove dead copper, pour order 1004): -47.066,-70.485 -35.712,-70.485 -35.712,-72.74 -35.712,-76.659 -23.089,-76.659 -22.758,-76.659 -22.758,-71.866 -22.758,-70.485 -14.707,-70.485 -14.707,-75.903 -9.804,-75.903 -9.804,-71.021 2.159,-71.021 2.159,-78.181 2.159,-78.237 23.749,-78.237 24.028,-78.237 24.028,-91.515 24.028,-95.885 22.53,-95.885 -21.006,-95.885 -21.006,-82.089 -21.006,-82.071 -47.066,-82.071 -47.066,-70.485
AGND on Bottom Layer "Top Layer-No Net" (solid, remove dead copper, pour order 1007): -65.141,-93.228 -22.901,-93.228 -22.901,-90.357 -22.901,-83.703 -26,-83.703 -48.733,-83.703 -48.733,-81.823 -48.733,-68.564 -45.66,-68.564 -33.925,-68.564 -33.925,-73.212 -33.925,-74.457 -23.943,-74.457 -23.968,-74.457 -23.968,-72.501 -23.968,-68.564 -16.729,-68.564 -13.503,-68.564 -13.503,-72.247 -13.503,-74.787 -11.039,-74.787 -11.039,-72.501 -11.039,-68.666 -5.045,-68.666 3.667,-68.666 3.667,-71.663 3.667,-75.778 13.878,-75.778 35.671,-75.778 35.671,-64.805 35.671,11.522 32.852,11.522 -74.184,11.522 -74.184,-2.804 -74.184,-93.278 -64.887,-93.278
GND on Bottom Layer "Top Layer-No Net" (solid, remove dead copper, pour order 1006): -47.066,-70.485 -35.712,-70.485 -35.712,-72.74 -35.712,-76.659 -23.089,-76.659 -22.758,-76.659 -22.758,-71.866 -22.758,-70.485 -14.707,-70.485 -14.707,-75.903 -9.804,-75.903 -9.804,-71.021 2.159,-71.021 2.159,-78.181 2.159,-78.237 23.749,-78.237 24.028,-78.237 24.028,-91.515 24.028,-95.885 22.53,-95.885 -21.006,-95.885 -21.006,-82.089 -21.006,-82.071 -47.066,-82.071 -47.066,-70.485

## Keep-outs
Keep-Out Layer:
  circle w0.1: c12.153,-4.375 r1.6
  circle w0.1: c12.178,-4.375 r1.6
  circle w0.05: c-38.5,-20 r0.025
  circle w0.05: c-38.5,-20 r0.025
  circle w0.05: c-38.5,-20 r0.025
  circle w0.05: c-38.5,-20 r0.025
  lines w0.127: -61.12,-49.911 -62.819,-49.911 -62.819,-92 -47.879,-92 -47.879,-87.757 -37.592,-87.757 -37.592,-92 22.082,-92 22.082,-66.675 8.89,-66.675 8.89,-53.721 31.415,-53.721 31.415,-0.915 30.5,0 0,0 -1,-1 -1,-20 cw(c-38.5,-20) -61.12,-49.909

## Other copper
Top Layer:
  rectangle net +5V: -5.613,-86.055 -0.61,-83.515
  rectangle net +5VV: -28.169,-88.824 -25.629,-87.478
  rectangle net +5VV: -30.328,-89.84 -25.603,-88.036
Bottom Layer:
  region net +5V: -3.058,-83.593 -7.045,-83.593 -7.045,-85.983 -3.058,-85.983
  rectangle net +5VV: -28.092,-89.893 -24.105,-87.503

## Silkscreen, mask and mechanical layers (free items; w line width, h text height)
Top Overlay:
  circle w0.254: c12.178,-4.375 r4
  lines w1.016: -101.498,77.373 -115.468,77.373 -115.468,35.154 -89.467,35.154 -89.467,77.373 -101.321,77.373 ; -58.522,77.114 -63.551,77.114 -63.551,50.749 -33.833,50.749 ; -58.42,77.114 5.283,77.114 5.283,67.691 18.466,67.691 ; -33.858,50.724 -33.858,44.348 -25.222,44.348 18.491,44.348 18.491,67.716 ; -31.775,-84.684 -31.75,-84.658 ; 20.549,-67.716 20.574,-67.691
  text "ISP" at 25.781,-8.331 h0.8
Top Solder:
  lines w1: 0.254,-51.562 0.254,-48.23 ; 0.453,-34.189 0.453,-30.857 ; 0.453,-24.792 0.453,-21.46 ; 0.453,-15.394 0.453,-12.062 ; 1.748,-9.597 3.073,-9.576 ; 2.286,-51.816 5.618,-51.816 ; 10.795,-51.816 14.127,-51.816 ; 11.649,-9.597 14.981,-9.597 ; 19.939,-51.816 23.271,-51.816 ; 21.551,-9.597 24.883,-9.597 ; 26.162,-51.308 26.162,-47.976 ; 26.255,-43.587 26.255,-40.255 ; 26.255,-34.189 26.255,-30.857 ; 26.255,-24.792 26.255,-21.46 ; 26.255,-15.394 26.255,-12.062
  lines w1.016: -61.468,-77.749 -61.468,-84.658 -53.772,-84.658 ; -61.468,-71.399 -61.468,-66.37 ; -61.468,-62.56 -61.468,-58.293 -55.093,-58.293 ; -46.888,-58.293 -39.522,-58.293 ; -31.75,-85.827 -31.75,-84.658 ; -24.206,-91.059 -16.993,-91.059 ; -17.577,-58.293 -13.818,-58.293 ; 1.168,-91.059 5.918,-91.059 ; 3.277,-58.293 7.366,-58.293 7.366,-62.509 ; 16.434,-91.059 20.574,-91.059 20.574,-86.462 ; 17.069,-67.691 20.574,-67.691 20.574,-70.764
Mechanical 15:
  lines w0.254: -24.401,-88 -24.401,-54.765 ; -22.35,-88 -22.35,-54.401 31.5,-54.401 ; -19.893,-52.529 31.5,-52.529

## Dimensions
-63.551,77.114 to 5.283,67.691 on Top Overlay
18.466,67.691 to 18.491,44.348 on Top Overlay
18.491,44.348 to -33.858,50.724 on Top Overlay
5.283,67.691 to 18.491,67.716 on Top Overlay
-63.551,50.749 to -58.42,77.114 on Top Overlay
-63.551,50.749 to -33.858,44.348 on Top Overlay
-115.468,35.154 to -115.468,77.373 on Top Overlay
-115.468,35.154 to -89.467,35.154 on Top Overlay

## Text inside footprints (layer, text, board x,y; h text height)
P1: Bottom Overlay "2" at -24.46,-83.236 h0.8; Bottom Overlay "1" at -24.613,-90.881 h0.8
P10: Top Overlay "6" at 19.28,-6.365 h0.8; Top Overlay "5" at 19.147,-3.614 h0.8; Top Overlay "2" at 28.555,-6.225 h0.8; Top Overlay "1" at 28.513,-3.516 h0.8